# Altium PCB FOOTPRINT FOR UPPER PART V1 (1).pcbdoc
Units mil, origin at the board's own origin, x right, y up, seen from the top; angles counter-clockwise.
Board outline 3689 x 3689 mil, 2 copper layers (Top Layer, Bottom Layer), stack 62.2 mil thick; 1 components, 0 nets, 0 pads, 0 vias.
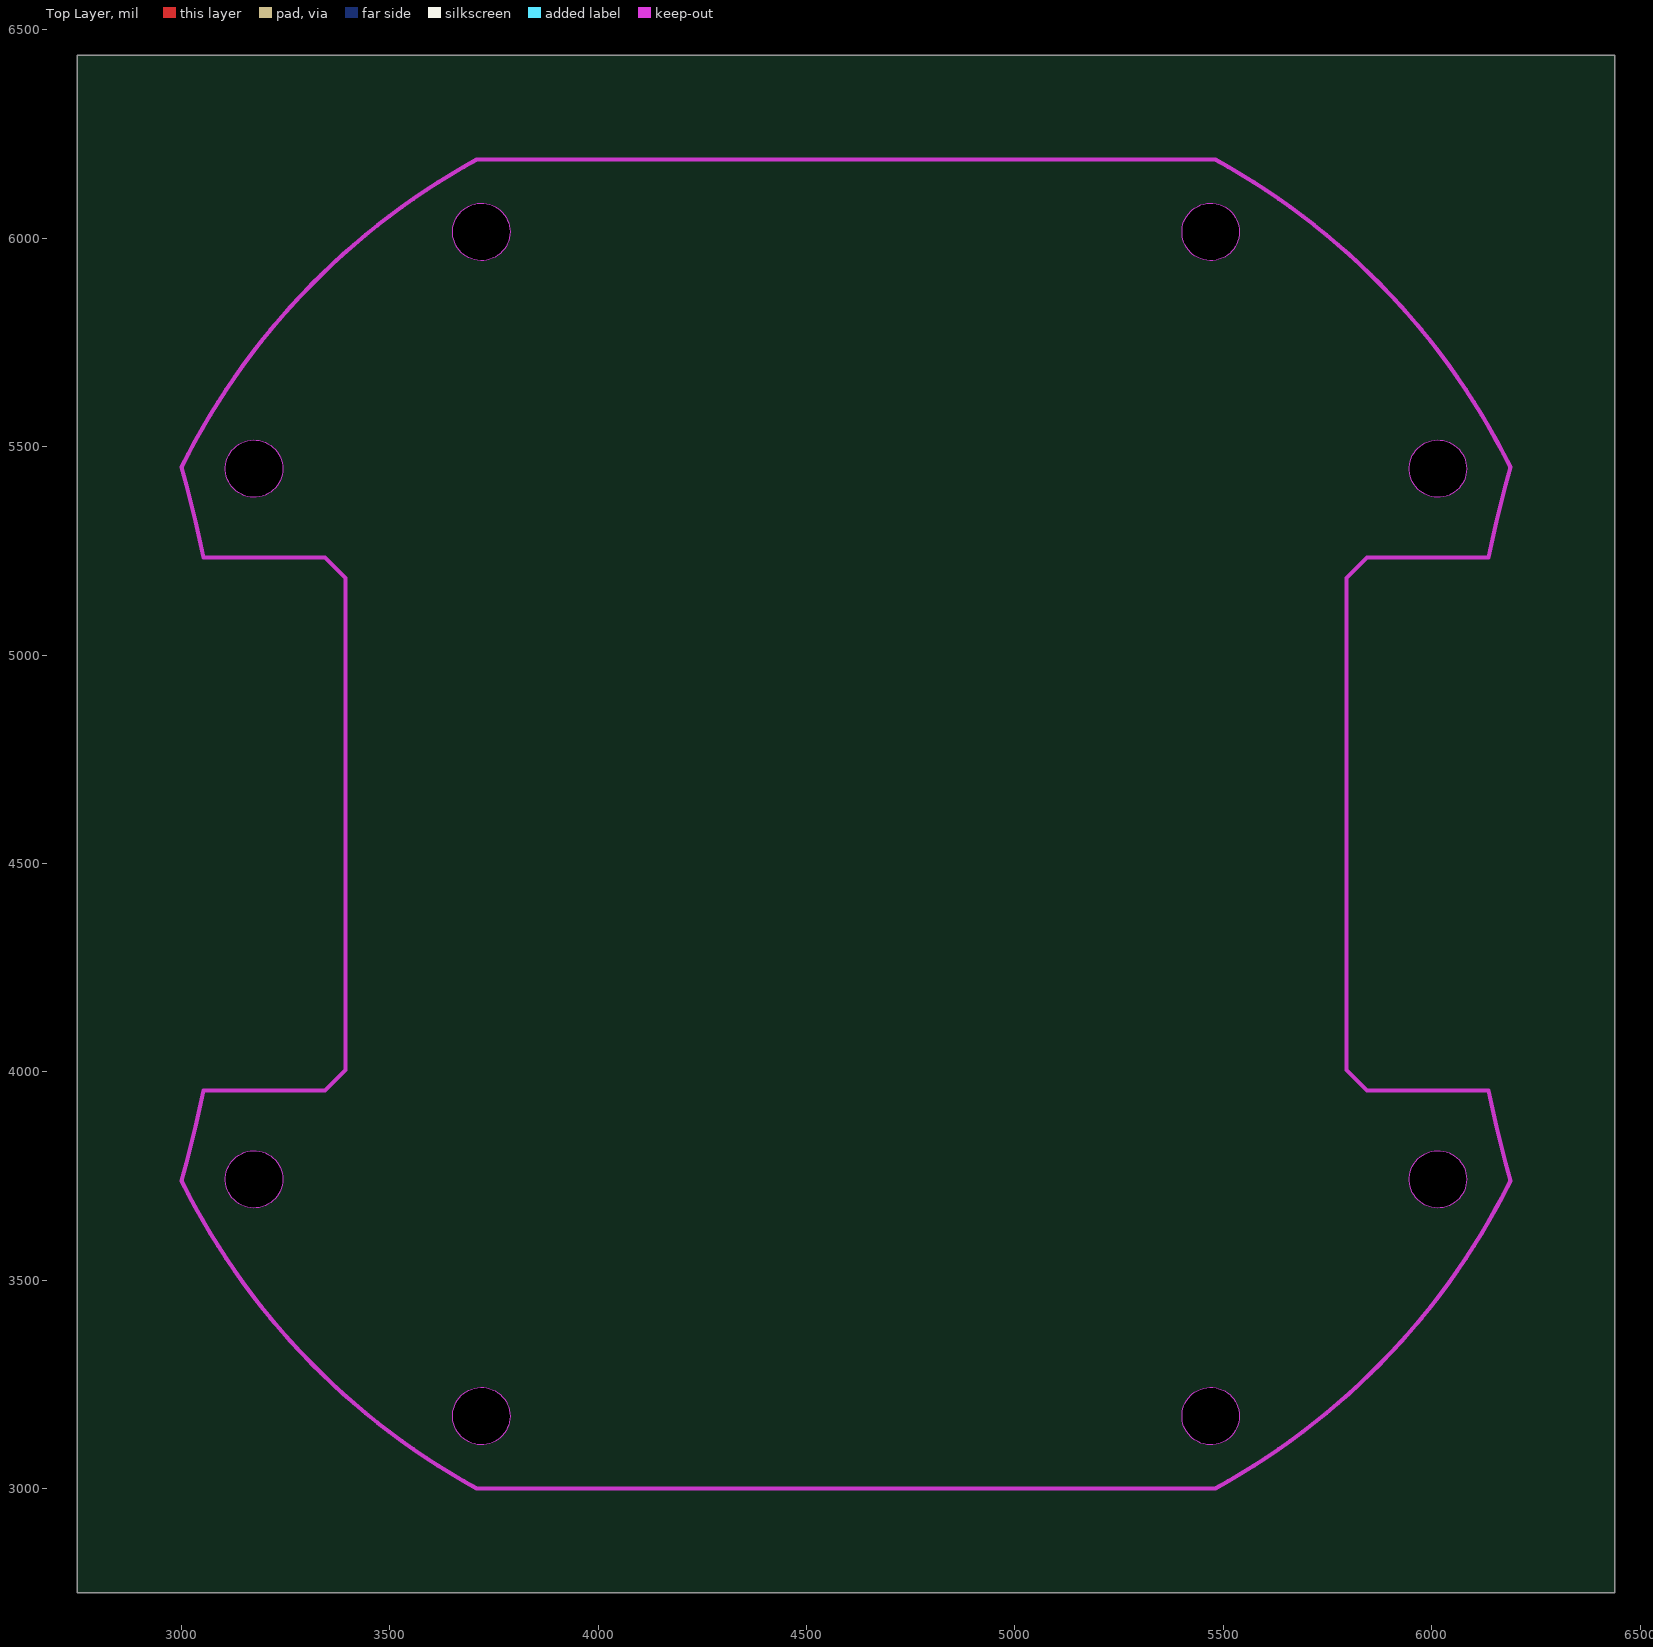
[diagram p0: Top Layer view]
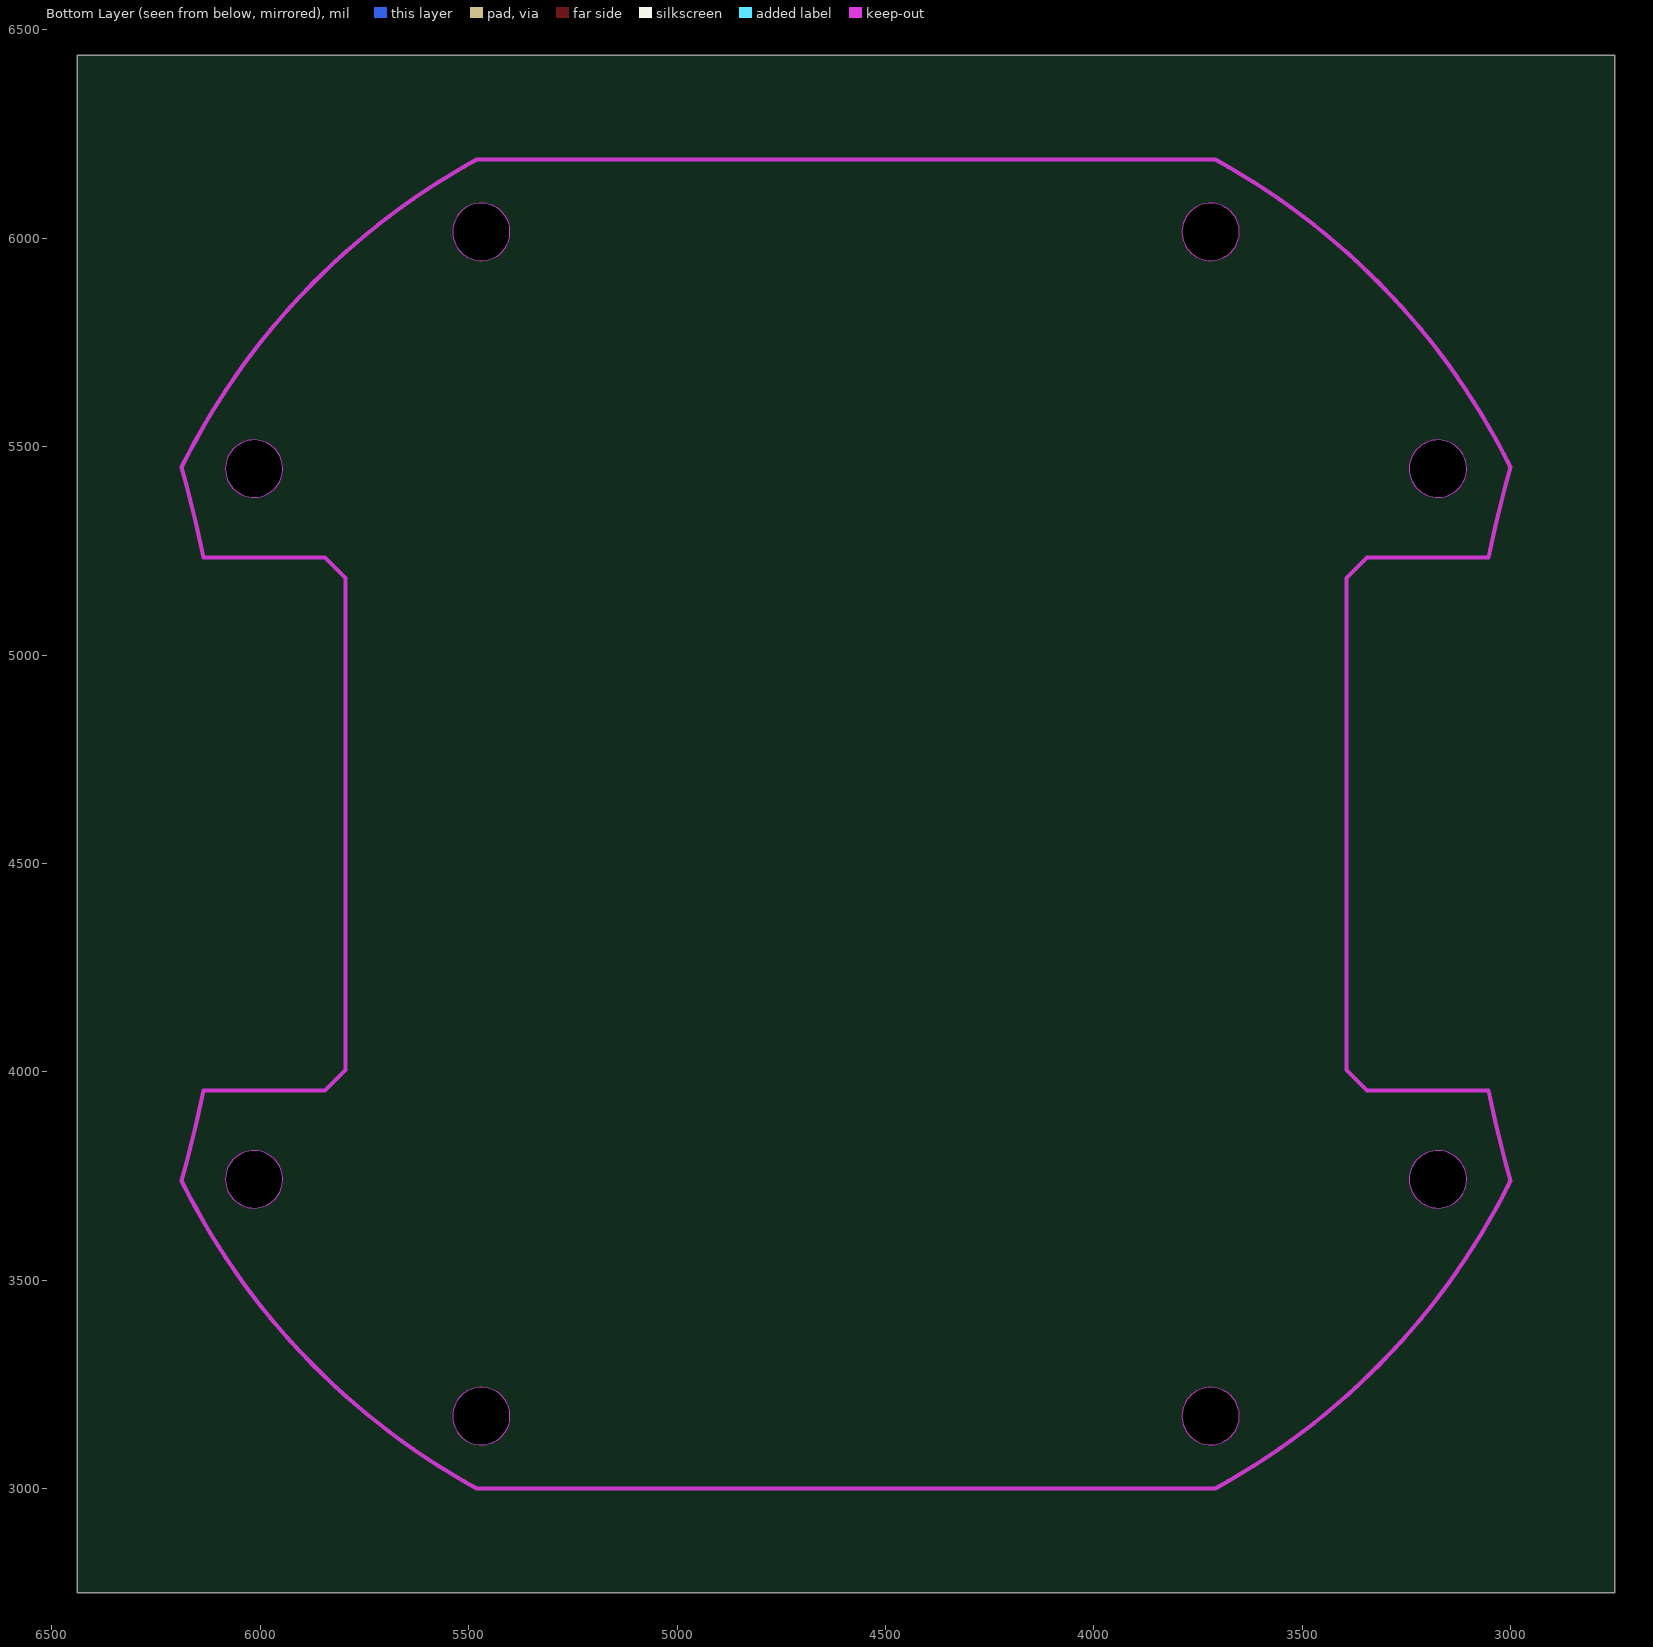
[diagram p1: Bottom Layer view, seen from below]

## Layer stack, top to bottom
Top Solder Mask Layer: solder mask 0.4, Dk 3.3
Top Layer: signal copper 1.4
Dielectric1: surface 59.4, FR4, Dk 4.5
Bottom Layer: signal copper 1.4
Bottom Solder Mask Layer: solder mask 0.4, Dk 3.3

## Board outline
6439,2750 2750,2750 2750,6439 6439,6439

## Components (designator, comment, footprint, x,y, rotation, side; value= is the part's Value field where it differs from the comment)
? "" "FOOTPRINT FOR UPPER PART V1" 4043.7,6194 r0 top

## Footprints (in the part's own frame and the unit in brackets; to place one, negate y for a bottom-side part, rotate by r counter-clockwise, add the part's x,y. Pads: shape width x height; smd on the part's side, far side on the other; paste and mask are expansions set on the pad)
"FOOTPRINT FOR UPPER PART V1" [mil]
  Board Outline Layer drawing of 622 lines, arcs and shapes, not listed
  Board Outline Layer region: -800.8,-2452.3 -801.2,-2459.6 -802.4,-2466.8 -804.3,-2473.9 -807,-2480.8 -810.4,-2487.3 -814.4,-2493.4 -819.1,-2499 -824.3,-2504.1 -830.1,-2508.7 -836.3,-2512.6 -842.9,-2515.8 -849.8,-2518.2 -857,-2520 -864.2,-2521 -871.6,-2521.2 -878.9,-2520.6 -886.1,-2519.2 -893.1,-2517.1 -899.8,-2514.2 -906.3,-2510.7 -912.3,-2506.5 -917.8,-2501.6 -922.8,-2496.3 -927.1,-2490.4 -930.9,-2484.1 -933.9,-2477.4 -936.2,-2470.4 -937.7,-2463.2 -938.5,-2456 -938.5,-2448.6 -937.7,-2441.3 -936.2,-2434.2 -933.9,-2427.2 -930.9,-2420.5 -927.1,-2414.2 -922.8,-2408.3 -917.8,-2402.9 -912.3,-2398.1 -906.3,-2393.9 -899.8,-2390.3 -893.1,-2387.5 -886.1,-2385.4 -878.9,-2384 -871.6,-2383.4 -864.2,-2383.6 -857,-2384.6 -849.8,-2386.3 -842.9,-2388.8 -836.3,-2392 -830.1,-2395.9 -824.3,-2400.4 -819.1,-2405.5 -814.4,-2411.2 -810.4,-2417.3 -807,-2423.8 -804.3,-2430.6 -802.4,-2437.7 -801.2,-2445
  Board Outline Layer region: -800.8,-2452.3 -801.2,-2459.6 -802.4,-2466.8 -804.3,-2473.9 -807,-2480.8 -810.4,-2487.3 -814.4,-2493.4 -819.1,-2499 -824.3,-2504.1 -830.1,-2508.7 -836.3,-2512.6 -842.9,-2515.8 -849.8,-2518.2 -857,-2520 -864.2,-2521 -871.6,-2521.2 -878.9,-2520.6 -886.1,-2519.2 -893.1,-2517.1 -899.8,-2514.2 -906.3,-2510.7 -912.3,-2506.5 -917.8,-2501.6 -922.8,-2496.3 -927.1,-2490.4 -930.9,-2484.1 -933.9,-2477.4 -936.2,-2470.4 -937.7,-2463.2 -938.5,-2456 -938.5,-2448.6 -937.7,-2441.3 -936.2,-2434.2 -933.9,-2427.2 -930.9,-2420.5 -927.1,-2414.2 -922.8,-2408.3 -917.8,-2402.9 -912.3,-2398.1 -906.3,-2393.9 -899.8,-2390.3 -893.1,-2387.5 -886.1,-2385.4 -878.9,-2384 -871.6,-2383.4 -864.2,-2383.6 -857,-2384.6 -849.8,-2386.3 -842.9,-2388.8 -836.3,-2392 -830.1,-2395.9 -824.3,-2400.4 -819.1,-2405.5 -814.4,-2411.2 -810.4,-2417.3 -807,-2423.8 -804.3,-2430.6 -802.4,-2437.7 -801.2,-2445
  Board Outline Layer region: -800.8,-746.7 -801.2,-754.1 -802.4,-761.3 -804.3,-768.4 -807,-775.2 -810.4,-781.7 -814.4,-787.8 -819.1,-793.5 -824.3,-798.6 -830.1,-803.1 -836.3,-807 -842.9,-810.2 -849.8,-812.7 -857,-814.4 -864.2,-815.4 -871.6,-815.6 -878.9,-815 -886.1,-813.7 -893.1,-811.6 -899.8,-808.7 -906.3,-805.1 -912.3,-800.9 -917.8,-796.1 -922.8,-790.7 -927.1,-784.8 -930.9,-778.5 -933.9,-771.8 -936.2,-764.9 -937.7,-757.7 -938.5,-750.4 -938.5,-743.1 -937.7,-735.8 -936.2,-728.6 -933.9,-721.7 -930.9,-715 -927.1,-708.7 -922.8,-702.8 -917.8,-697.4 -912.3,-692.5 -906.3,-688.3 -899.8,-684.8 -893.1,-681.9 -886.1,-679.8 -878.9,-678.5 -871.6,-677.9 -864.2,-678.1 -857,-679 -849.8,-680.8 -842.9,-683.3 -836.3,-686.5 -830.1,-690.4 -824.3,-694.9 -819.1,-700 -814.4,-705.7 -810.4,-711.8 -807,-718.3 -804.3,-725.1 -802.4,-732.2 -801.2,-739.4
  Board Outline Layer region: -800.8,-746.7 -801.2,-754.1 -802.4,-761.3 -804.3,-768.4 -807,-775.2 -810.4,-781.7 -814.4,-787.8 -819.1,-793.5 -824.3,-798.6 -830.1,-803.1 -836.3,-807 -842.9,-810.2 -849.8,-812.7 -857,-814.4 -864.2,-815.4 -871.6,-815.6 -878.9,-815 -886.1,-813.7 -893.1,-811.6 -899.8,-808.7 -906.3,-805.1 -912.3,-800.9 -917.8,-796.1 -922.8,-790.7 -927.1,-784.8 -930.9,-778.5 -933.9,-771.8 -936.2,-764.9 -937.7,-757.7 -938.5,-750.4 -938.5,-743.1 -937.7,-735.8 -936.2,-728.6 -933.9,-721.7 -930.9,-715 -927.1,-708.7 -922.8,-702.8 -917.8,-697.4 -912.3,-692.5 -906.3,-688.3 -899.8,-684.8 -893.1,-681.9 -886.1,-679.8 -878.9,-678.5 -871.6,-677.9 -864.2,-678.1 -857,-679 -849.8,-680.8 -842.9,-683.3 -836.3,-686.5 -830.1,-690.4 -824.3,-694.9 -819.1,-700 -814.4,-705.7 -810.4,-711.8 -807,-718.3 -804.3,-725.1 -802.4,-732.2 -801.2,-739.4
  Board Outline Layer region: -255.5,-178.7 -255.9,-186 -257.1,-193.3 -259,-200.4 -261.7,-207.2 -265.1,-213.7 -269.1,-219.8 -273.8,-225.5 -279,-230.6 -284.8,-235.1 -291,-239 -297.6,-242.2 -304.5,-244.7 -311.6,-246.4 -318.9,-247.4 -326.2,-247.6 -333.6,-247 -340.8,-245.6 -347.8,-243.5 -354.5,-240.7 -361,-237.1 -367,-232.9 -372.5,-228.1 -377.5,-222.7 -381.8,-216.8 -385.6,-210.5 -388.6,-203.8 -390.9,-196.8 -392.4,-189.7 -393.2,-182.4 -393.2,-175.1 -392.4,-167.8 -390.9,-160.6 -388.6,-153.6 -385.6,-147 -381.8,-140.6 -377.5,-134.7 -372.5,-129.4 -367,-124.5 -361,-120.3 -354.5,-116.8 -347.8,-113.9 -340.8,-111.8 -333.6,-110.4 -326.2,-109.8 -318.9,-110 -311.6,-111 -304.5,-112.8 -297.6,-115.2 -291,-118.4 -284.8,-122.3 -279,-126.9 -273.8,-132 -269.1,-137.6 -265.1,-143.7 -261.7,-150.2 -259,-157.1 -257.1,-164.2 -255.9,-171.4
  Board Outline Layer region: -255.5,-178.7 -255.9,-186 -257.1,-193.3 -259,-200.4 -261.7,-207.2 -265.1,-213.7 -269.1,-219.8 -273.8,-225.5 -279,-230.6 -284.8,-235.1 -291,-239 -297.6,-242.2 -304.5,-244.7 -311.6,-246.4 -318.9,-247.4 -326.2,-247.6 -333.6,-247 -340.8,-245.6 -347.8,-243.5 -354.5,-240.7 -361,-237.1 -367,-232.9 -372.5,-228.1 -377.5,-222.7 -381.8,-216.8 -385.6,-210.5 -388.6,-203.8 -390.9,-196.8 -392.4,-189.7 -393.2,-182.4 -393.2,-175.1 -392.4,-167.8 -390.9,-160.6 -388.6,-153.6 -385.6,-147 -381.8,-140.6 -377.5,-134.7 -372.5,-129.4 -367,-124.5 -361,-120.3 -354.5,-116.8 -347.8,-113.9 -340.8,-111.8 -333.6,-110.4 -326.2,-109.8 -318.9,-110 -311.6,-111 -304.5,-112.8 -297.6,-115.2 -291,-118.4 -284.8,-122.3 -279,-126.9 -273.8,-132 -269.1,-137.6 -265.1,-143.7 -261.7,-150.2 -259,-157.1 -257.1,-164.2 -255.9,-171.4
  Board Outline Layer region: 1494.9,-178.7 1494.5,-186 1493.3,-193.3 1491.4,-200.4 1488.7,-207.2 1485.4,-213.7 1481.3,-219.8 1476.6,-225.5 1471.4,-230.6 1465.6,-235.1 1459.4,-239 1452.8,-242.2 1445.9,-244.7 1438.8,-246.4 1431.5,-247.4 1424.2,-247.6 1416.8,-247 1409.6,-245.6 1402.6,-243.5 1395.9,-240.7 1389.4,-237.1 1383.4,-232.9 1377.9,-228.1 1373,-222.7 1368.6,-216.8 1364.9,-210.5 1361.8,-203.8 1359.5,-196.8 1358,-189.7 1357.2,-182.4 1357.2,-175.1 1358,-167.8 1359.5,-160.6 1361.8,-153.6 1364.9,-147 1368.6,-140.6 1373,-134.7 1377.9,-129.4 1383.4,-124.5 1389.4,-120.3 1395.9,-116.8 1402.6,-113.9 1409.6,-111.8 1416.8,-110.4 1424.2,-109.8 1431.5,-110 1438.8,-111 1445.9,-112.8 1452.8,-115.2 1459.4,-118.4 1465.6,-122.3 1471.4,-126.9 1476.6,-132 1481.3,-137.6 1485.4,-143.7 1488.7,-150.2 1491.4,-157.1 1493.3,-164.2 1494.5,-171.4
  Board Outline Layer region: 1494.9,-178.7 1494.5,-186 1493.3,-193.3 1491.4,-200.4 1488.7,-207.2 1485.4,-213.7 1481.3,-219.8 1476.6,-225.5 1471.4,-230.6 1465.6,-235.1 1459.4,-239 1452.8,-242.2 1445.9,-244.7 1438.8,-246.4 1431.5,-247.4 1424.2,-247.6 1416.8,-247 1409.6,-245.6 1402.6,-243.5 1395.9,-240.7 1389.4,-237.1 1383.4,-232.9 1377.9,-228.1 1373,-222.7 1368.6,-216.8 1364.9,-210.5 1361.8,-203.8 1359.5,-196.8 1358,-189.7 1357.2,-182.4 1357.2,-175.1 1358,-167.8 1359.5,-160.6 1361.8,-153.6 1364.9,-147 1368.6,-140.6 1373,-134.7 1377.9,-129.4 1383.4,-124.5 1389.4,-120.3 1395.9,-116.8 1402.6,-113.9 1409.6,-111.8 1416.8,-110.4 1424.2,-109.8 1431.5,-110 1438.8,-111 1445.9,-112.8 1452.8,-115.2 1459.4,-118.4 1465.6,-122.3 1471.4,-126.9 1476.6,-132 1481.3,-137.6 1485.4,-143.7 1488.7,-150.2 1491.4,-157.1 1493.3,-164.2 1494.5,-171.4
  Board Outline Layer region: 2040.2,-746.7 2039.8,-754.1 2038.6,-761.3 2036.7,-768.4 2034,-775.2 2030.7,-781.7 2026.6,-787.8 2021.9,-793.5 2016.7,-798.6 2010.9,-803.1 2004.7,-807 1998.1,-810.2 1991.2,-812.7 1984.1,-814.4 1976.8,-815.4 1969.5,-815.6 1962.1,-815 1954.9,-813.7 1947.9,-811.6 1941.2,-808.7 1934.7,-805.1 1928.7,-800.9 1923.2,-796.1 1918.3,-790.7 1913.9,-784.8 1910.2,-778.5 1907.1,-771.8 1904.8,-764.9 1903.3,-757.7 1902.5,-750.4 1902.5,-743.1 1903.3,-735.8 1904.8,-728.6 1907.1,-721.7 1910.2,-715 1913.9,-708.7 1918.3,-702.8 1923.2,-697.4 1928.7,-692.5 1934.7,-688.3 1941.2,-684.8 1947.9,-681.9 1954.9,-679.8 1962.1,-678.5 1969.5,-677.9 1976.8,-678.1 1984.1,-679 1991.2,-680.8 1998.1,-683.3 2004.7,-686.5 2010.9,-690.4 2016.7,-694.9 2021.9,-700 2026.6,-705.7 2030.7,-711.8 2034,-718.3 2036.7,-725.1 2038.6,-732.2 2039.8,-739.4
  Board Outline Layer region: 2040.2,-746.7 2039.8,-754.1 2038.6,-761.3 2036.7,-768.4 2034,-775.2 2030.7,-781.7 2026.6,-787.8 2021.9,-793.5 2016.7,-798.6 2010.9,-803.1 2004.7,-807 1998.1,-810.2 1991.2,-812.7 1984.1,-814.4 1976.8,-815.4 1969.5,-815.6 1962.1,-815 1954.9,-813.7 1947.9,-811.6 1941.2,-808.7 1934.7,-805.1 1928.7,-800.9 1923.2,-796.1 1918.3,-790.7 1913.9,-784.8 1910.2,-778.5 1907.1,-771.8 1904.8,-764.9 1903.3,-757.7 1902.5,-750.4 1902.5,-743.1 1903.3,-735.8 1904.8,-728.6 1907.1,-721.7 1910.2,-715 1913.9,-708.7 1918.3,-702.8 1923.2,-697.4 1928.7,-692.5 1934.7,-688.3 1941.2,-684.8 1947.9,-681.9 1954.9,-679.8 1962.1,-678.5 1969.5,-677.9 1976.8,-678.1 1984.1,-679 1991.2,-680.8 1998.1,-683.3 2004.7,-686.5 2010.9,-690.4 2016.7,-694.9 2021.9,-700 2026.6,-705.7 2030.7,-711.8 2034,-718.3 2036.7,-725.1 2038.6,-732.2 2039.8,-739.4
  Board Outline Layer region: 2040.2,-2452.3 2039.8,-2459.6 2038.6,-2466.8 2036.7,-2473.9 2034,-2480.8 2030.7,-2487.3 2026.6,-2493.4 2021.9,-2499 2016.7,-2504.1 2010.9,-2508.7 2004.7,-2512.6 1998.1,-2515.8 1991.2,-2518.2 1984.1,-2520 1976.8,-2521 1969.5,-2521.2 1962.1,-2520.6 1954.9,-2519.2 1947.9,-2517.1 1941.2,-2514.2 1934.7,-2510.7 1928.7,-2506.5 1923.2,-2501.6 1918.3,-2496.3 1913.9,-2490.4 1910.2,-2484.1 1907.1,-2477.4 1904.8,-2470.4 1903.3,-2463.2 1902.5,-2456 1902.5,-2448.6 1903.3,-2441.3 1904.8,-2434.2 1907.1,-2427.2 1910.2,-2420.5 1913.9,-2414.2 1918.3,-2408.3 1923.2,-2402.9 1928.7,-2398.1 1934.7,-2393.9 1941.2,-2390.3 1947.9,-2387.5 1954.9,-2385.4 1962.1,-2384 1969.5,-2383.4 1976.8,-2383.6 1984.1,-2384.6 1991.2,-2386.3 1998.1,-2388.8 2004.7,-2392 2010.9,-2395.9 2016.7,-2400.4 2021.9,-2405.5 2026.6,-2411.2 2030.7,-2417.3 2034,-2423.8 2036.7,-2430.6 2038.6,-2437.7 2039.8,-2445
  Board Outline Layer region: 2040.2,-2452.3 2039.8,-2459.6 2038.6,-2466.8 2036.7,-2473.9 2034,-2480.8 2030.7,-2487.3 2026.6,-2493.4 2021.9,-2499 2016.7,-2504.1 2010.9,-2508.7 2004.7,-2512.6 1998.1,-2515.8 1991.2,-2518.2 1984.1,-2520 1976.8,-2521 1969.5,-2521.2 1962.1,-2520.6 1954.9,-2519.2 1947.9,-2517.1 1941.2,-2514.2 1934.7,-2510.7 1928.7,-2506.5 1923.2,-2501.6 1918.3,-2496.3 1913.9,-2490.4 1910.2,-2484.1 1907.1,-2477.4 1904.8,-2470.4 1903.3,-2463.2 1902.5,-2456 1902.5,-2448.6 1903.3,-2441.3 1904.8,-2434.2 1907.1,-2427.2 1910.2,-2420.5 1913.9,-2414.2 1918.3,-2408.3 1923.2,-2402.9 1928.7,-2398.1 1934.7,-2393.9 1941.2,-2390.3 1947.9,-2387.5 1954.9,-2385.4 1962.1,-2384 1969.5,-2383.4 1976.8,-2383.6 1984.1,-2384.6 1991.2,-2386.3 1998.1,-2388.8 2004.7,-2392 2010.9,-2395.9 2016.7,-2400.4 2021.9,-2405.5 2026.6,-2411.2 2030.7,-2417.3 2034,-2423.8 2036.7,-2430.6 2038.6,-2437.7 2039.8,-2445
  Board Outline Layer region: 1494.9,-3020.3 1494.5,-3027.6 1493.3,-3034.9 1491.4,-3041.9 1488.7,-3048.8 1485.4,-3055.3 1481.3,-3061.4 1476.6,-3067 1471.4,-3072.2 1465.6,-3076.7 1459.4,-3080.6 1452.8,-3083.8 1445.9,-3086.3 1438.8,-3088 1431.5,-3089 1424.2,-3089.2 1416.8,-3088.6 1409.6,-3087.2 1402.6,-3085.1 1395.9,-3082.3 1389.4,-3078.7 1383.4,-3074.5 1377.9,-3069.7 1373,-3064.3 1368.6,-3058.4 1364.9,-3052.1 1361.8,-3045.4 1359.5,-3038.4 1358,-3031.3 1357.2,-3024 1357.2,-3016.6 1358,-3009.3 1359.5,-3002.2 1361.8,-2995.2 1364.9,-2988.5 1368.6,-2982.2 1373,-2976.3 1377.9,-2970.9 1383.4,-2966.1 1389.4,-2961.9 1395.9,-2958.3 1402.6,-2955.5 1409.6,-2953.4 1416.8,-2952 1424.2,-2951.4 1431.5,-2951.6 1438.8,-2952.6 1445.9,-2954.3 1452.8,-2956.8 1459.4,-2960 1465.6,-2963.9 1471.4,-2968.5 1476.6,-2973.6 1481.3,-2979.2 1485.4,-2985.3 1488.7,-2991.8 1491.4,-2998.7 1493.3,-3005.7 1494.5,-3013
  Board Outline Layer region: 1494.9,-3020.3 1494.5,-3027.6 1493.3,-3034.9 1491.4,-3041.9 1488.7,-3048.8 1485.4,-3055.3 1481.3,-3061.4 1476.6,-3067 1471.4,-3072.2 1465.6,-3076.7 1459.4,-3080.6 1452.8,-3083.8 1445.9,-3086.3 1438.8,-3088 1431.5,-3089 1424.2,-3089.2 1416.8,-3088.6 1409.6,-3087.2 1402.6,-3085.1 1395.9,-3082.3 1389.4,-3078.7 1383.4,-3074.5 1377.9,-3069.7 1373,-3064.3 1368.6,-3058.4 1364.9,-3052.1 1361.8,-3045.4 1359.5,-3038.4 1358,-3031.3 1357.2,-3024 1357.2,-3016.6 1358,-3009.3 1359.5,-3002.2 1361.8,-2995.2 1364.9,-2988.5 1368.6,-2982.2 1373,-2976.3 1377.9,-2970.9 1383.4,-2966.1 1389.4,-2961.9 1395.9,-2958.3 1402.6,-2955.5 1409.6,-2953.4 1416.8,-2952 1424.2,-2951.4 1431.5,-2951.6 1438.8,-2952.6 1445.9,-2954.3 1452.8,-2956.8 1459.4,-2960 1465.6,-2963.9 1471.4,-2968.5 1476.6,-2973.6 1481.3,-2979.2 1485.4,-2985.3 1488.7,-2991.8 1491.4,-2998.7 1493.3,-3005.7 1494.5,-3013
  Board Outline Layer region: -255.5,-3020.3 -255.9,-3027.6 -257.1,-3034.9 -259,-3041.9 -261.7,-3048.8 -265.1,-3055.3 -269.1,-3061.4 -273.8,-3067 -279,-3072.2 -284.8,-3076.7 -291,-3080.6 -297.6,-3083.8 -304.5,-3086.3 -311.6,-3088 -318.9,-3089 -326.2,-3089.2 -333.6,-3088.6 -340.8,-3087.2 -347.8,-3085.1 -354.5,-3082.3 -361,-3078.7 -367,-3074.5 -372.5,-3069.7 -377.5,-3064.3 -381.8,-3058.4 -385.6,-3052.1 -388.6,-3045.4 -390.9,-3038.4 -392.4,-3031.3 -393.2,-3024 -393.2,-3016.6 -392.4,-3009.3 -390.9,-3002.2 -388.6,-2995.2 -385.6,-2988.5 -381.8,-2982.2 -377.5,-2976.3 -372.5,-2970.9 -367,-2966.1 -361,-2961.9 -354.5,-2958.3 -347.8,-2955.5 -340.8,-2953.4 -333.6,-2952 -326.2,-2951.4 -318.9,-2951.6 -311.6,-2952.6 -304.5,-2954.3 -297.6,-2956.8 -291,-2960 -284.8,-2963.9 -279,-2968.5 -273.8,-2973.6 -269.1,-2979.2 -265.1,-2985.3 -261.7,-2991.8 -259,-2998.7 -257.1,-3005.7 -255.9,-3013
  Board Outline Layer region: -255.5,-3020.3 -255.9,-3027.6 -257.1,-3034.9 -259,-3041.9 -261.7,-3048.8 -265.1,-3055.3 -269.1,-3061.4 -273.8,-3067 -279,-3072.2 -284.8,-3076.7 -291,-3080.6 -297.6,-3083.8 -304.5,-3086.3 -311.6,-3088 -318.9,-3089 -326.2,-3089.2 -333.6,-3088.6 -340.8,-3087.2 -347.8,-3085.1 -354.5,-3082.3 -361,-3078.7 -367,-3074.5 -372.5,-3069.7 -377.5,-3064.3 -381.8,-3058.4 -385.6,-3052.1 -388.6,-3045.4 -390.9,-3038.4 -392.4,-3031.3 -393.2,-3024 -393.2,-3016.6 -392.4,-3009.3 -390.9,-3002.2 -388.6,-2995.2 -385.6,-2988.5 -381.8,-2982.2 -377.5,-2976.3 -372.5,-2970.9 -367,-2966.1 -361,-2961.9 -354.5,-2958.3 -347.8,-2955.5 -340.8,-2953.4 -333.6,-2952 -326.2,-2951.4 -318.9,-2951.6 -311.6,-2952.6 -304.5,-2954.3 -297.6,-2956.8 -291,-2960 -284.8,-2963.9 -279,-2968.5 -273.8,-2973.6 -269.1,-2979.2 -265.1,-2985.3 -261.7,-2991.8 -259,-2998.7 -257.1,-3005.7 -255.9,-3013
  Multi-Layer board cut-out: -800.8,-2452.3 -801.2,-2459.6 -802.4,-2466.8 -804.3,-2473.9 -807,-2480.8 -810.4,-2487.3 -814.4,-2493.4 -819.1,-2499 -824.3,-2504.1 -830.1,-2508.7 -836.3,-2512.6 -842.9,-2515.8 -849.8,-2518.2 -857,-2520 -864.2,-2521 -871.6,-2521.2 -878.9,-2520.6 -886.1,-2519.2 -893.1,-2517.1 -899.8,-2514.2 -906.3,-2510.7 -912.3,-2506.5 -917.8,-2501.6 -922.8,-2496.3 -927.1,-2490.4 -930.9,-2484.1 -933.9,-2477.4 -936.2,-2470.4 -937.7,-2463.2 -938.5,-2456 -938.5,-2448.6 -937.7,-2441.3 -936.2,-2434.2 -933.9,-2427.2 -930.9,-2420.5 -927.1,-2414.2 -922.8,-2408.3 -917.8,-2402.9 -912.3,-2398.1 -906.3,-2393.9 -899.8,-2390.3 -893.1,-2387.5 -886.1,-2385.4 -878.9,-2384 -871.6,-2383.4 -864.2,-2383.6 -857,-2384.6 -849.8,-2386.3 -842.9,-2388.8 -836.3,-2392 -830.1,-2395.9 -824.3,-2400.4 -819.1,-2405.5 -814.4,-2411.2 -810.4,-2417.3 -807,-2423.8 -804.3,-2430.6 -802.4,-2437.7 -801.2,-2445
  Multi-Layer board cut-out: -800.8,-746.7 -801.2,-754.1 -802.4,-761.3 -804.3,-768.4 -807,-775.2 -810.4,-781.7 -814.4,-787.8 -819.1,-793.5 -824.3,-798.6 -830.1,-803.1 -836.3,-807 -842.9,-810.2 -849.8,-812.7 -857,-814.4 -864.2,-815.4 -871.6,-815.6 -878.9,-815 -886.1,-813.7 -893.1,-811.6 -899.8,-808.7 -906.3,-805.1 -912.3,-800.9 -917.8,-796.1 -922.8,-790.7 -927.1,-784.8 -930.9,-778.5 -933.9,-771.8 -936.2,-764.9 -937.7,-757.7 -938.5,-750.4 -938.5,-743.1 -937.7,-735.8 -936.2,-728.6 -933.9,-721.7 -930.9,-715 -927.1,-708.7 -922.8,-702.8 -917.8,-697.4 -912.3,-692.5 -906.3,-688.3 -899.8,-684.8 -893.1,-681.9 -886.1,-679.8 -878.9,-678.5 -871.6,-677.9 -864.2,-678.1 -857,-679 -849.8,-680.8 -842.9,-683.3 -836.3,-686.5 -830.1,-690.4 -824.3,-694.9 -819.1,-700 -814.4,-705.7 -810.4,-711.8 -807,-718.3 -804.3,-725.1 -802.4,-732.2 -801.2,-739.4
  Multi-Layer board cut-out: -255.5,-178.7 -255.9,-186 -257.1,-193.3 -259,-200.4 -261.7,-207.2 -265.1,-213.7 -269.1,-219.8 -273.8,-225.5 -279,-230.6 -284.8,-235.1 -291,-239 -297.6,-242.2 -304.5,-244.7 -311.6,-246.4 -318.9,-247.4 -326.2,-247.6 -333.6,-247 -340.8,-245.6 -347.8,-243.5 -354.5,-240.7 -361,-237.1 -367,-232.9 -372.5,-228.1 -377.5,-222.7 -381.8,-216.8 -385.6,-210.5 -388.6,-203.8 -390.9,-196.8 -392.4,-189.7 -393.2,-182.4 -393.2,-175.1 -392.4,-167.8 -390.9,-160.6 -388.6,-153.6 -385.6,-147 -381.8,-140.6 -377.5,-134.7 -372.5,-129.4 -367,-124.5 -361,-120.3 -354.5,-116.8 -347.8,-113.9 -340.8,-111.8 -333.6,-110.4 -326.2,-109.8 -318.9,-110 -311.6,-111 -304.5,-112.8 -297.6,-115.2 -291,-118.4 -284.8,-122.3 -279,-126.9 -273.8,-132 -269.1,-137.6 -265.1,-143.7 -261.7,-150.2 -259,-157.1 -257.1,-164.2 -255.9,-171.4
  Multi-Layer board cut-out: 1494.9,-178.7 1494.5,-186 1493.3,-193.3 1491.4,-200.4 1488.7,-207.2 1485.4,-213.7 1481.3,-219.8 1476.6,-225.5 1471.4,-230.6 1465.6,-235.1 1459.4,-239 1452.8,-242.2 1445.9,-244.7 1438.8,-246.4 1431.5,-247.4 1424.2,-247.6 1416.8,-247 1409.6,-245.6 1402.6,-243.5 1395.9,-240.7 1389.4,-237.1 1383.4,-232.9 1377.9,-228.1 1373,-222.7 1368.6,-216.8 1364.9,-210.5 1361.8,-203.8 1359.5,-196.8 1358,-189.7 1357.2,-182.4 1357.2,-175.1 1358,-167.8 1359.5,-160.6 1361.8,-153.6 1364.9,-147 1368.6,-140.6 1373,-134.7 1377.9,-129.4 1383.4,-124.5 1389.4,-120.3 1395.9,-116.8 1402.6,-113.9 1409.6,-111.8 1416.8,-110.4 1424.2,-109.8 1431.5,-110 1438.8,-111 1445.9,-112.8 1452.8,-115.2 1459.4,-118.4 1465.6,-122.3 1471.4,-126.9 1476.6,-132 1481.3,-137.6 1485.4,-143.7 1488.7,-150.2 1491.4,-157.1 1493.3,-164.2 1494.5,-171.4
  Multi-Layer board cut-out: 2040.2,-746.7 2039.8,-754.1 2038.6,-761.3 2036.7,-768.4 2034,-775.2 2030.7,-781.7 2026.6,-787.8 2021.9,-793.5 2016.7,-798.6 2010.9,-803.1 2004.7,-807 1998.1,-810.2 1991.2,-812.7 1984.1,-814.4 1976.8,-815.4 1969.5,-815.6 1962.1,-815 1954.9,-813.7 1947.9,-811.6 1941.2,-808.7 1934.7,-805.1 1928.7,-800.9 1923.2,-796.1 1918.3,-790.7 1913.9,-784.8 1910.2,-778.5 1907.1,-771.8 1904.8,-764.9 1903.3,-757.7 1902.5,-750.4 1902.5,-743.1 1903.3,-735.8 1904.8,-728.6 1907.1,-721.7 1910.2,-715 1913.9,-708.7 1918.3,-702.8 1923.2,-697.4 1928.7,-692.5 1934.7,-688.3 1941.2,-684.8 1947.9,-681.9 1954.9,-679.8 1962.1,-678.5 1969.5,-677.9 1976.8,-678.1 1984.1,-679 1991.2,-680.8 1998.1,-683.3 2004.7,-686.5 2010.9,-690.4 2016.7,-694.9 2021.9,-700 2026.6,-705.7 2030.7,-711.8 2034,-718.3 2036.7,-725.1 2038.6,-732.2 2039.8,-739.4
  Multi-Layer board cut-out: 2040.2,-2452.3 2039.8,-2459.6 2038.6,-2466.8 2036.7,-2473.9 2034,-2480.8 2030.7,-2487.3 2026.6,-2493.4 2021.9,-2499 2016.7,-2504.1 2010.9,-2508.7 2004.7,-2512.6 1998.1,-2515.8 1991.2,-2518.2 1984.1,-2520 1976.8,-2521 1969.5,-2521.2 1962.1,-2520.6 1954.9,-2519.2 1947.9,-2517.1 1941.2,-2514.2 1934.7,-2510.7 1928.7,-2506.5 1923.2,-2501.6 1918.3,-2496.3 1913.9,-2490.4 1910.2,-2484.1 1907.1,-2477.4 1904.8,-2470.4 1903.3,-2463.2 1902.5,-2456 1902.5,-2448.6 1903.3,-2441.3 1904.8,-2434.2 1907.1,-2427.2 1910.2,-2420.5 1913.9,-2414.2 1918.3,-2408.3 1923.2,-2402.9 1928.7,-2398.1 1934.7,-2393.9 1941.2,-2390.3 1947.9,-2387.5 1954.9,-2385.4 1962.1,-2384 1969.5,-2383.4 1976.8,-2383.6 1984.1,-2384.6 1991.2,-2386.3 1998.1,-2388.8 2004.7,-2392 2010.9,-2395.9 2016.7,-2400.4 2021.9,-2405.5 2026.6,-2411.2 2030.7,-2417.3 2034,-2423.8 2036.7,-2430.6 2038.6,-2437.7 2039.8,-2445
  Multi-Layer board cut-out: 1494.9,-3020.3 1494.5,-3027.6 1493.3,-3034.9 1491.4,-3041.9 1488.7,-3048.8 1485.4,-3055.3 1481.3,-3061.4 1476.6,-3067 1471.4,-3072.2 1465.6,-3076.7 1459.4,-3080.6 1452.8,-3083.8 1445.9,-3086.3 1438.8,-3088 1431.5,-3089 1424.2,-3089.2 1416.8,-3088.6 1409.6,-3087.2 1402.6,-3085.1 1395.9,-3082.3 1389.4,-3078.7 1383.4,-3074.5 1377.9,-3069.7 1373,-3064.3 1368.6,-3058.4 1364.9,-3052.1 1361.8,-3045.4 1359.5,-3038.4 1358,-3031.3 1357.2,-3024 1357.2,-3016.6 1358,-3009.3 1359.5,-3002.2 1361.8,-2995.2 1364.9,-2988.5 1368.6,-2982.2 1373,-2976.3 1377.9,-2970.9 1383.4,-2966.1 1389.4,-2961.9 1395.9,-2958.3 1402.6,-2955.5 1409.6,-2953.4 1416.8,-2952 1424.2,-2951.4 1431.5,-2951.6 1438.8,-2952.6 1445.9,-2954.3 1452.8,-2956.8 1459.4,-2960 1465.6,-2963.9 1471.4,-2968.5 1476.6,-2973.6 1481.3,-2979.2 1485.4,-2985.3 1488.7,-2991.8 1491.4,-2998.7 1493.3,-3005.7 1494.5,-3013
  Multi-Layer board cut-out: -255.5,-3020.3 -255.9,-3027.6 -257.1,-3034.9 -259,-3041.9 -261.7,-3048.8 -265.1,-3055.3 -269.1,-3061.4 -273.8,-3067 -279,-3072.2 -284.8,-3076.7 -291,-3080.6 -297.6,-3083.8 -304.5,-3086.3 -311.6,-3088 -318.9,-3089 -326.2,-3089.2 -333.6,-3088.6 -340.8,-3087.2 -347.8,-3085.1 -354.5,-3082.3 -361,-3078.7 -367,-3074.5 -372.5,-3069.7 -377.5,-3064.3 -381.8,-3058.4 -385.6,-3052.1 -388.6,-3045.4 -390.9,-3038.4 -392.4,-3031.3 -393.2,-3024 -393.2,-3016.6 -392.4,-3009.3 -390.9,-3002.2 -388.6,-2995.2 -385.6,-2988.5 -381.8,-2982.2 -377.5,-2976.3 -372.5,-2970.9 -367,-2966.1 -361,-2961.9 -354.5,-2958.3 -347.8,-2955.5 -340.8,-2953.4 -333.6,-2952 -326.2,-2951.4 -318.9,-2951.6 -311.6,-2952.6 -304.5,-2954.3 -297.6,-2956.8 -291,-2960 -284.8,-2963.9 -279,-2968.5 -273.8,-2973.6 -269.1,-2979.2 -265.1,-2985.3 -261.7,-2991.8 -259,-2998.7 -257.1,-3005.7 -255.9,-3013

## Nets (pads, with @x,y where several pads share a name; then routed paths per layer and width w, separated by ;. In a path a pad name is that pad's centre, name@x,y a point inside that pad or via, vN(x,y) a via of type N, cw(c..) or ccw(c..) an arc to the next point about the centre after c; other vN are vias at no path point)